# Altium PCB PCB1.PcbDoc
Units mil, origin at the board's own origin, x right, y up, seen from the top; angles counter-clockwise.
Board outline 905 x 1925 mil, 2 copper layers (Top Layer, Bottom Layer); 11 components, 8 nets, 24 pads, 0 vias.
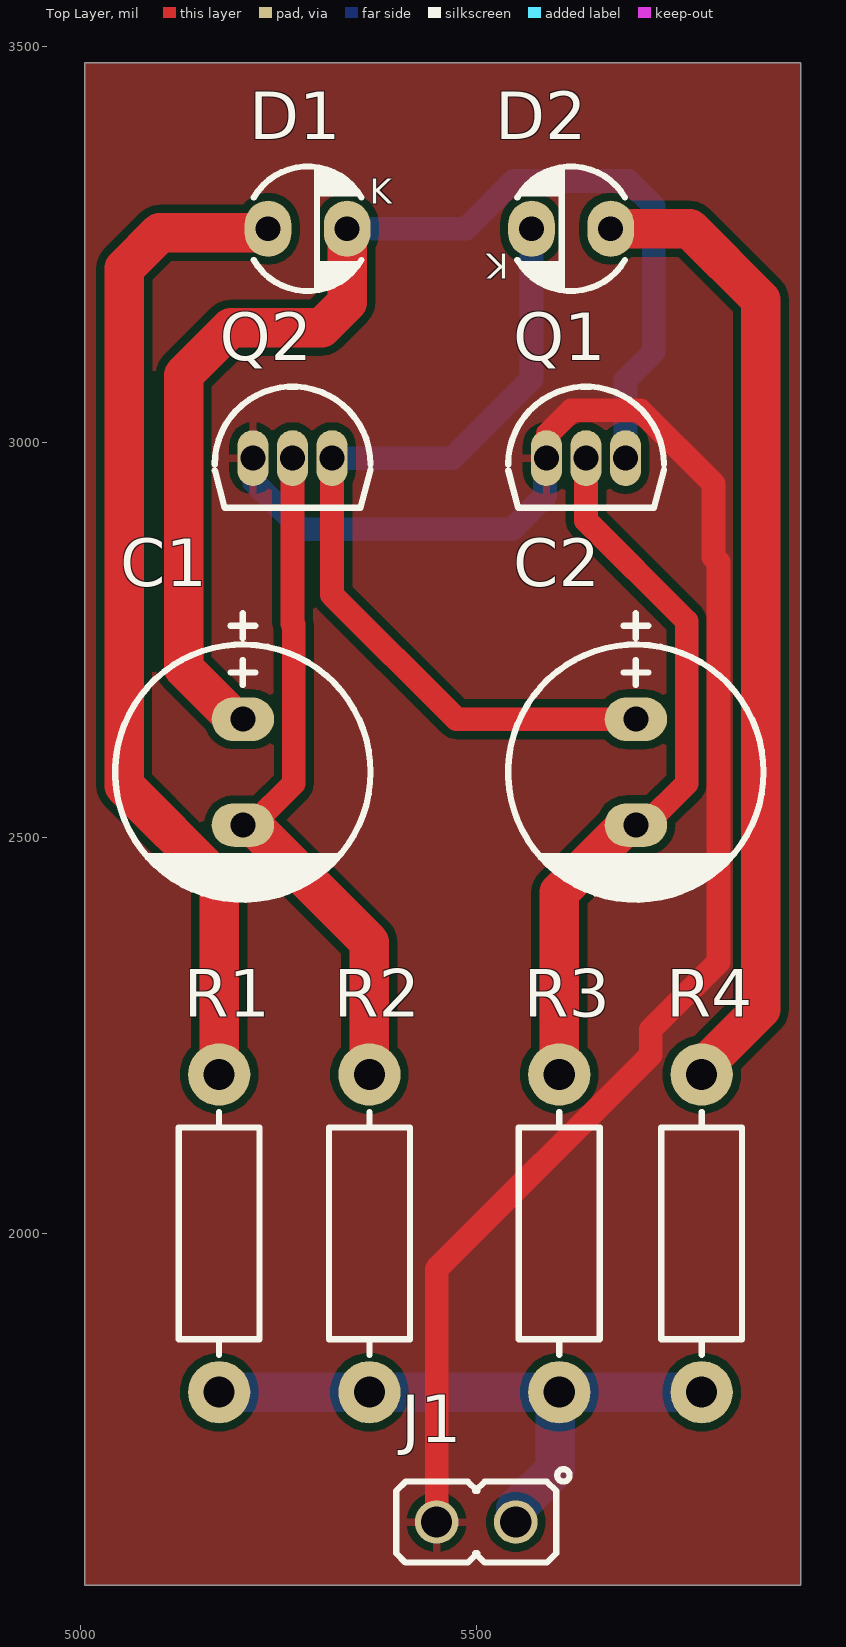
[diagram p0: Top Layer view]
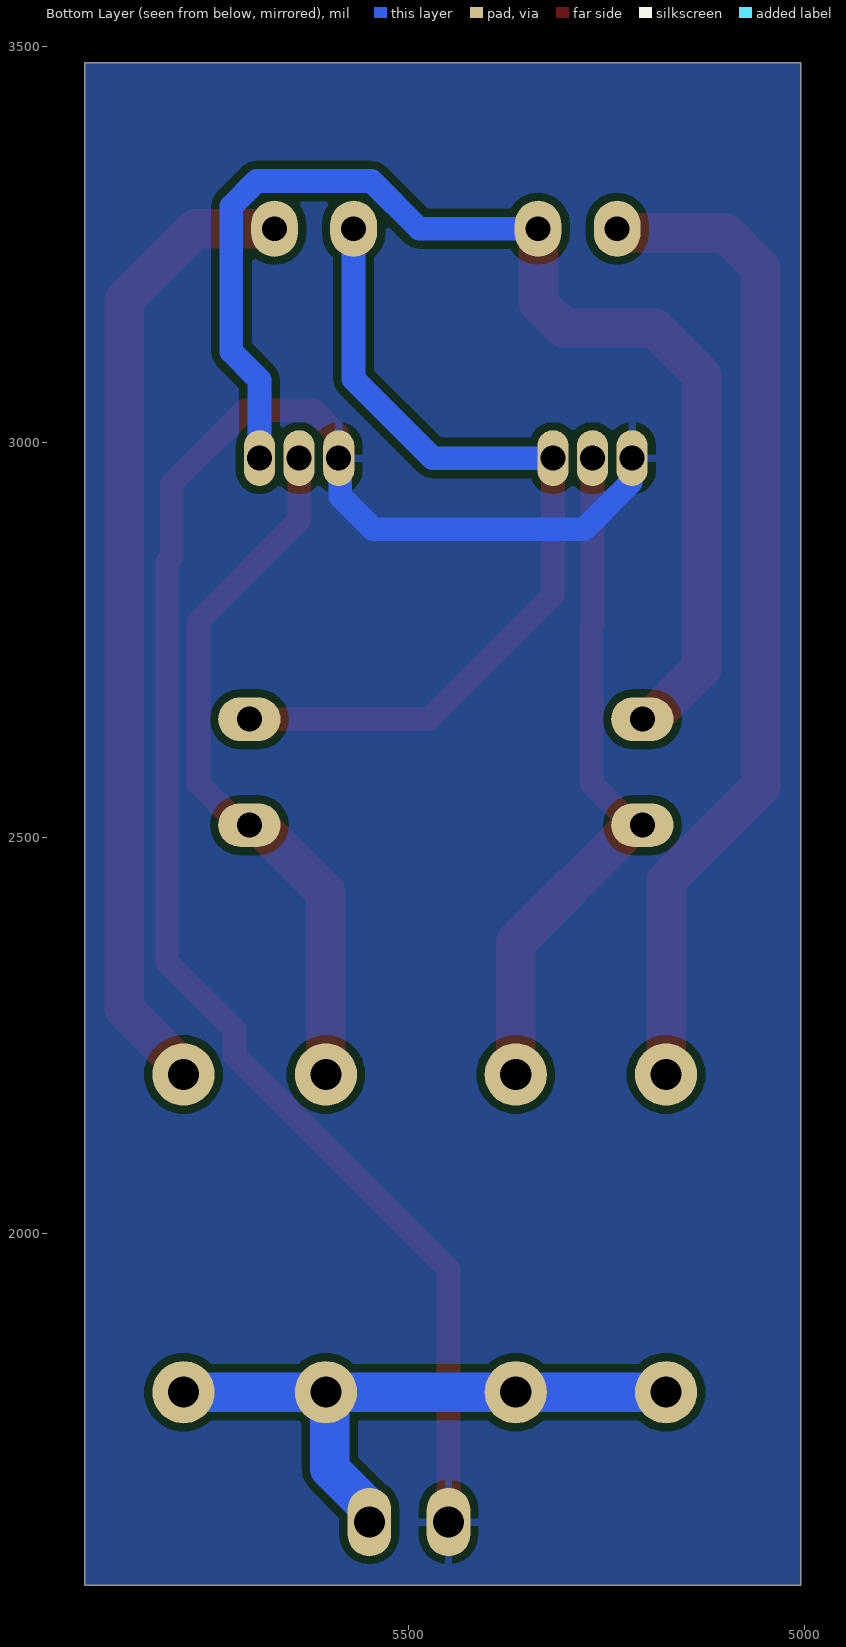
[diagram p1: Bottom Layer view, seen from below]
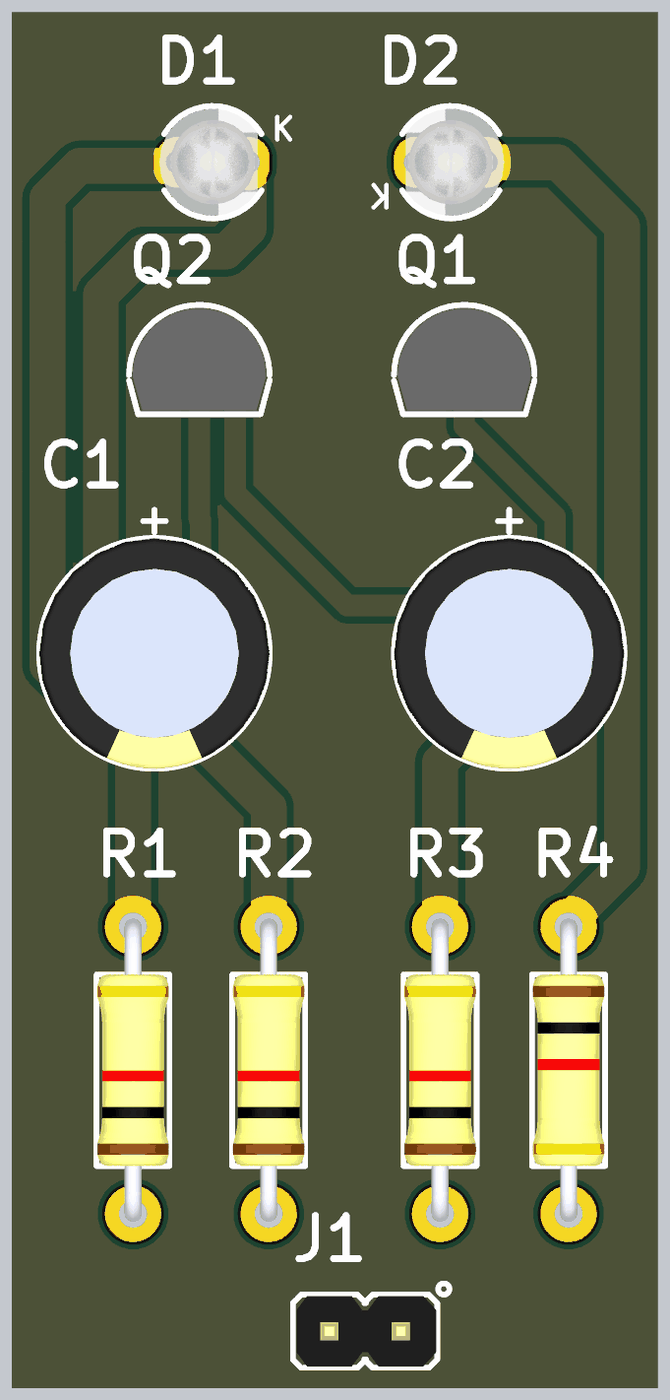
[diagram p2: 3D render of the assembled board from above, using the file's embedded part models]

## Layer stack, top to bottom
Top Solder: solder mask 0.4, Solder Resist, Dk 3.5
Top Layer: signal copper 1.4
Dielectric 1: dielectric 12.6, FR-4, Dk 4.8
Bottom Layer: signal copper 1.4
Bottom Solder: solder mask 0.4, Solder Resist, Dk 3.5

## Board outline
5005,1555 5910,1555 5910,3480 5005,3480

## Design rules (kind name [scope] priority, off if disabled: settings)
Clearance [All] p1: gap=10 ignorepadtopadclearanceinfootprint=FALSE
PolygonConnect [All] p1: connectstyle=Relief reliefconductorwidth=10 reliefentries=4 polygonreliefangle="90 Angle" airgapwidth=10
RoutingVias [All] p1: holewidth=28 width=50 viastyle="Through Hole" minholewidth=28 minwidth=50 maxholewidth=28 maxwidth=50
SolderMaskExpansion [All] p1: expansion=4 istentingtop=FALSE
SupplyNets "Schematic Supply Nets_1" [InNet('VCC')] p1: voltage=0.000
SupplyNets "Schematic Supply Nets" [InNet('GND')] p2: voltage=0.000
Width [All] p1: maxlimit=50 minlimit=10 preferedwidth=30 minimp=50.000000 maximp=50.000000 favimp=50.000000
30 further rules are at their usual default settings.

## Components (designator, comment, footprint, x,y, rotation, side; value= is the part's Value field where it differs from the comment)
C1 "10uF" C_EL_8X14 5205.01,2583.07 r270 top
C2 "10uF" C_EL_8X14 5701.83,2583.07 r270 top
D1 "LED3MM" LED3MM 5286.83,3270 r0 top
D2 "LED3MM" LED3MM 5620,3270 r180 top
J1 "HDRM2" HDR_M_1X2 5500,1635 r180 top
Q1 "PN2222A" TO92_3 5638.83,2980 r0 top
Q2 "PN2222A" TO92_3 5267.84,2980 r0 top
R1 "470 ohm" R025W_AX04 5175,2000 r90 top
R2 "47k" R025W_AX04 5365,2000 r90 top
R3 "47k" R025W_AX04 5605,2000 r90 top
R4 "470 ohm" R025W_AX04 5785,2000 r270 top

## Footprints (in the part's own frame and the unit in brackets; to place one, negate y for a bottom-side part, rotate by r counter-clockwise, add the part's x,y. Pads: shape width x height; smd on the part's side, far side on the other; paste and mask are expansions set on the pad)
C_EL_8X14 [mm] "Capacitor Electrolythic, D8X14H pitch: 3.5mm"
  oval 1.4x2 hole 0.8: 1(-1.7,0) 2(1.7,0)
  silkscreen extent -5.1,-4.1 4.1,4.1, body extent -4.09,-4.1 4.1,4.1, height 14.6
HDR_M_1X2 [mm] "Connector; Header; 2 Position"
  round 1.4 / inner round 1.4 / far side oval 1.4x2.2 hole 1 mask+0.1: 1(-1.27,0) 2(1.27,0)
  silkscreen extent -3,-1.7 2.57,1.3, body extent -2.54,-1.25 2.44,1.25, height 8.72
LED3MM [mm] "LED THD 3MM"
  oval 1.5x1.8 hole 0.8: 1(-1.27,0) 2(1.27,0)
  silkscreen extent -1.73,-2 1.73,2, body extent -1.9,-1.9 1.6,1.9, height 6.5
R025W_AX04 [mm] "RESISTOR 1/4 WATT, AXIAL0.4"
  round 2 hole 1: 1(-5.1,0) 2(5.1,0)
  silkscreen extent -3.9,-1.3 3.9,1.3, body extent -5.38,-1.28 5.38,1.28, height 2.6
TO92_3 [mm] "TO-92, SOT54"
  oval 1x1.8 hole 0.8 mask+0.1: 1(-1.27,0) 2(0,0) 3(1.27,0)
  silkscreen extent -2.5,-1.59 2.5,2.3, body extent -2.38,-1.45 2.38,2.18, height 7.82

## Part data
C1 C2: library part CAP_THD_EL, "CAP, THD, ELEC,", ASSEMBLY=ASSEMBLY, DESC=DESCRIPTION, DIST#=MOUSER, MANF=MANF, MANF_P#=MANF_PART#, PARAM=20%, PARAM2=25V, PRICE="10= 5$"
D1 D2: library part LED_THD_3MM, "LED, THD, 3MM, GREEN", ASSEMBLY=ASSEMBLY, DESC=DESCRIPTION, MANF=MANF, MANF_P#=MANF_PART#, PARAM2=2.2V, PRICE=PRICE
J1: library part HDR_M_1X2, "CONN, HEADER, Male, pitch: 2.54mm, 2POS"
Q1 Q2: library part NPN_PN2222A_TO92, "BJT, NPN, 40v, 0.6A, THD, TO92", MANF=DIOTEC, MANF_P#=PN2222A, PARAM="0.6A, hFE100~300", PARAM2="40v, 625mW"
R1 R2 R3 R4: library part RES_THD, "RESISTOR, THD", ASSEMBLY=ASSEMBLY, DESC=DESCRIPTION, DIST#=MOUSER, MANF="KOA SPEER", MANF_P#=RK73H1ETTP4701F, PARAM=0.063W, PARAM2=1%, PRICE="100= 0.5$"

## Nets (pads, with @x,y where several pads share a name; then routed paths per layer and width w, separated by ;. In a path a pad name is that pad's centre, name@x,y a point inside that pad or via, vN(x,y) a via of type N, cw(c..) or ccw(c..) an arc to the next point about the centre after c; other vN are vias at no path point)
GND: J1.2 Q1.1 Q2.1 | length 2244
  Top Layer w30: J1.2 5450,1954.75 5720.63,2225.38 5720.63,2257.6 5806.2,2343.17 5806.2,2848.8 5800,2855 5800,2947.78 5707.34,3040.43 5620.33,3040.43 5590.63,3010.74 5590.63,2981.79 Q1.1
  Bottom Layer w30: Q2.1 5219.63,2978.21 5219.63,2949.26 5278.89,2890 5545,2890 5587.04,2932.04 5587.04,2978.21 Q1.1
NetC1_1: C1.1 D1.2 Q1.3 | length 1569.4
  Top Layer w50: C1.1 5194.57,2650 5130,2714.57 5130,3085 5190,3145 5305,3145 5336.83,3176.83 D1.2
  Bottom Layer w30: D1.2 5486.98,3270 5547.41,3330.43 5692.59,3330.43 5724.53,3298.49 5724.53,3114.53 5688.83,3078.83 Q1.3
NetC1_2: C1.2 Q2.2 R2.2 | length 874.8
  Top Layer w30: C1.2 5216.81,2516.14 5269.37,2568.7 5269.37,2769.45 5267.84,2770.98 Q2.2
  Top Layer w50: C1.2@5216.81,2516.14 5365,2367.95 R2.2
NetC2_1: C2.1 D2.2 Q2.3 | length 1105.5
  Top Layer w30: Q2.3 5317.84,2807.16 5475,2650 C2.1
  Bottom Layer w30: Q2.3 5470,2980 5570,3080 D2.2
NetC2_2: C2.2 Q1.2 R3.2 | length 912.6
  Top Layer w30: Q1.2 5638.83,2901.17 5766.2,2773.8 5766.2,2568.7 5713.64,2516.14 C2.2
  Top Layer w50: R3.2 5605,2431.13 5690.02,2516.14 C2.2
NetD1_1: D1.1 R1.2 | length 1271.9
  Top Layer w50: R1.2 5175,2445.86 5055,2565.86 5055,3220 5100,3265 5232.64,3265 5236.83,3269.18 D1.1
NetD2_1: D2.1 R4.1 | length 1237.6
  Top Layer w50: D2.1 5770,3270 5860,3180 5860,2283.56 5785,2208.56 R4.1
VCC: J1.1 R1.1 R2.1 R3.1 R4.2 | length 797
  Bottom Layer w50: R1.1 R2.1 R3.1 ; J1.1 5550,1652.13 5600,1702.13 5600,1794.21 R3.1 ; R4.2 R3.1

## Polygon pours and split planes (outlines as drawn)
GND on Top Layer "GND_L01_P000" (solid, pour order 0): 5005,1555 5910,1555 5910,3480 5005,3480
GND on Bottom Layer "GND_L02_P001" (solid, pour order 1): 5005,1555 5910,1555 5910,3480 5005,3480

## Text inside footprints (layer, text, board x,y; h text height)
D1: Top Overlay "K" at 5365.57,3301.5 h31.5
D2: Top Overlay "K" at 5541.26,3238.5 h31.5 r180